# Altium PCB etapa_3.PcbDoc
Units mm, origin at the board's own origin, x right, y up, seen from the top; angles counter-clockwise.
Board outline 39 x 30.7 mm, 4 copper layers (Top Layer, X, Y, Bottom Layer); 124 components, 79 nets, 312 pads, 0 vias.
Unrouted connection lines stored in the file: 245.
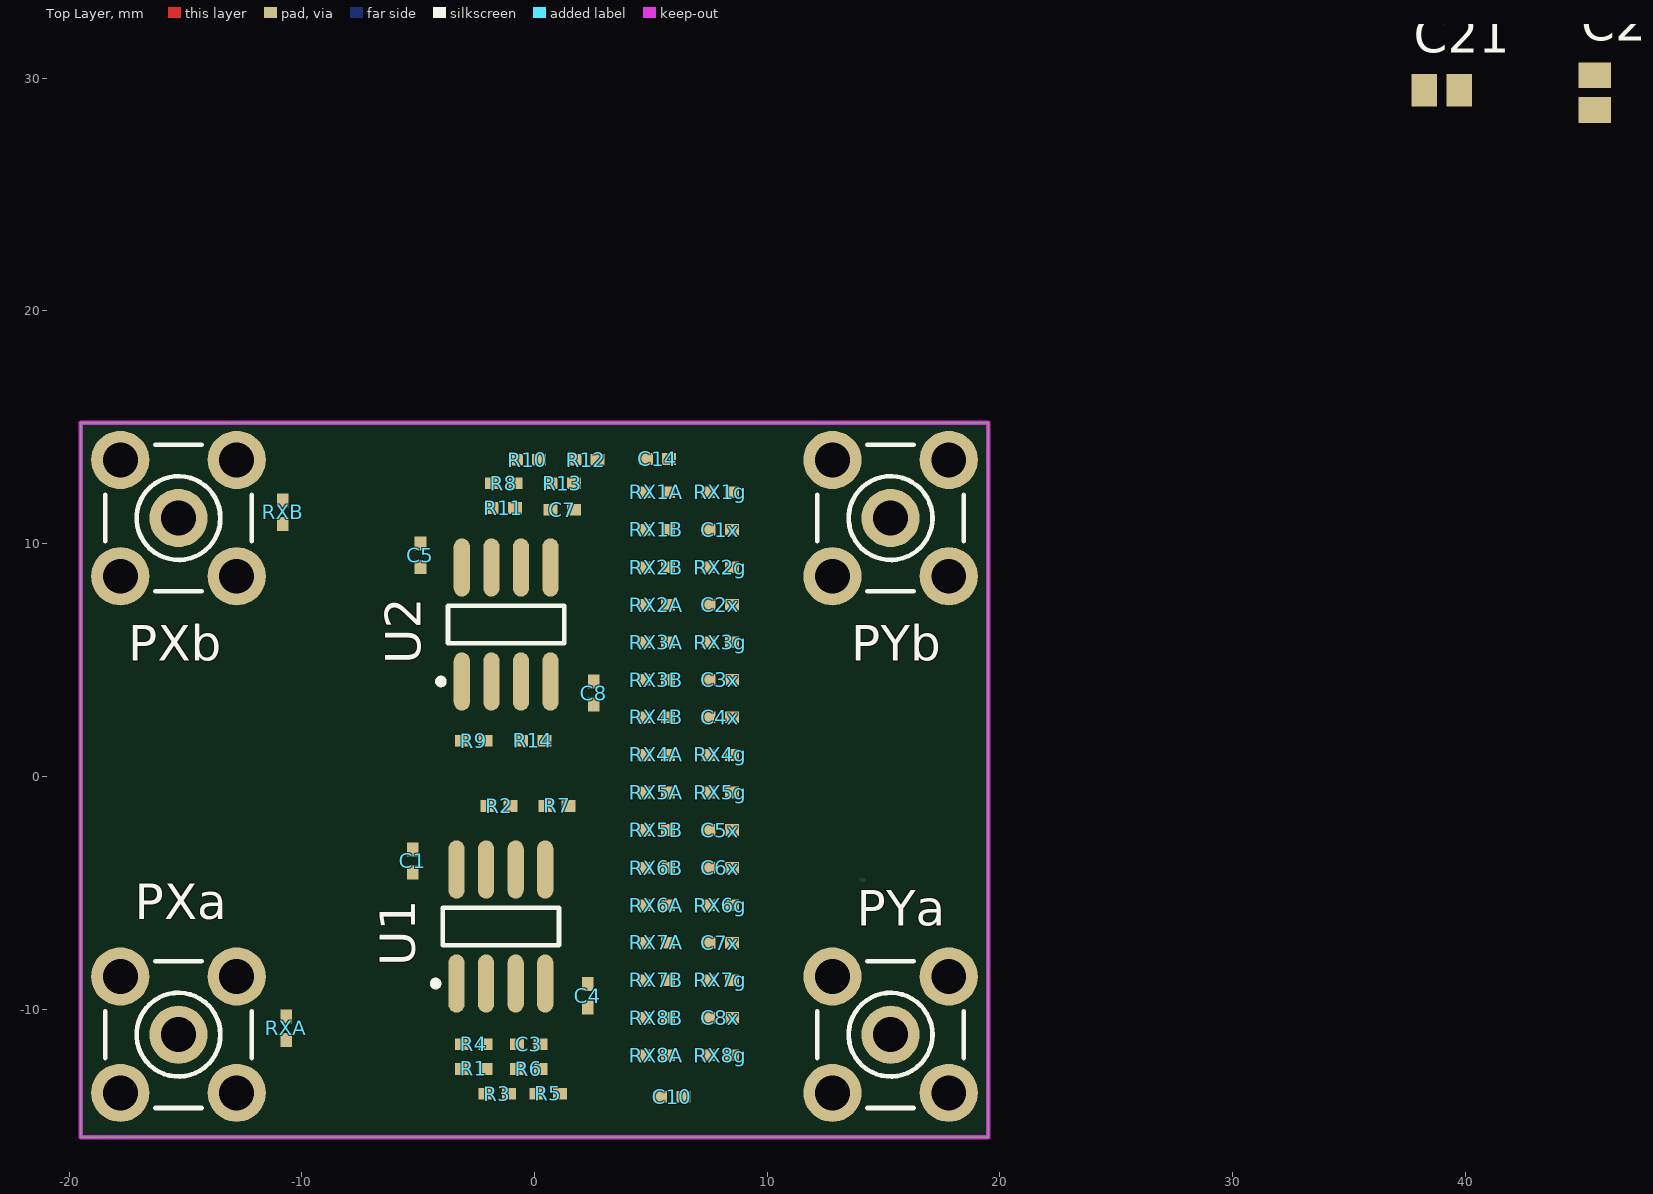
[diagram p0: Top Layer view]
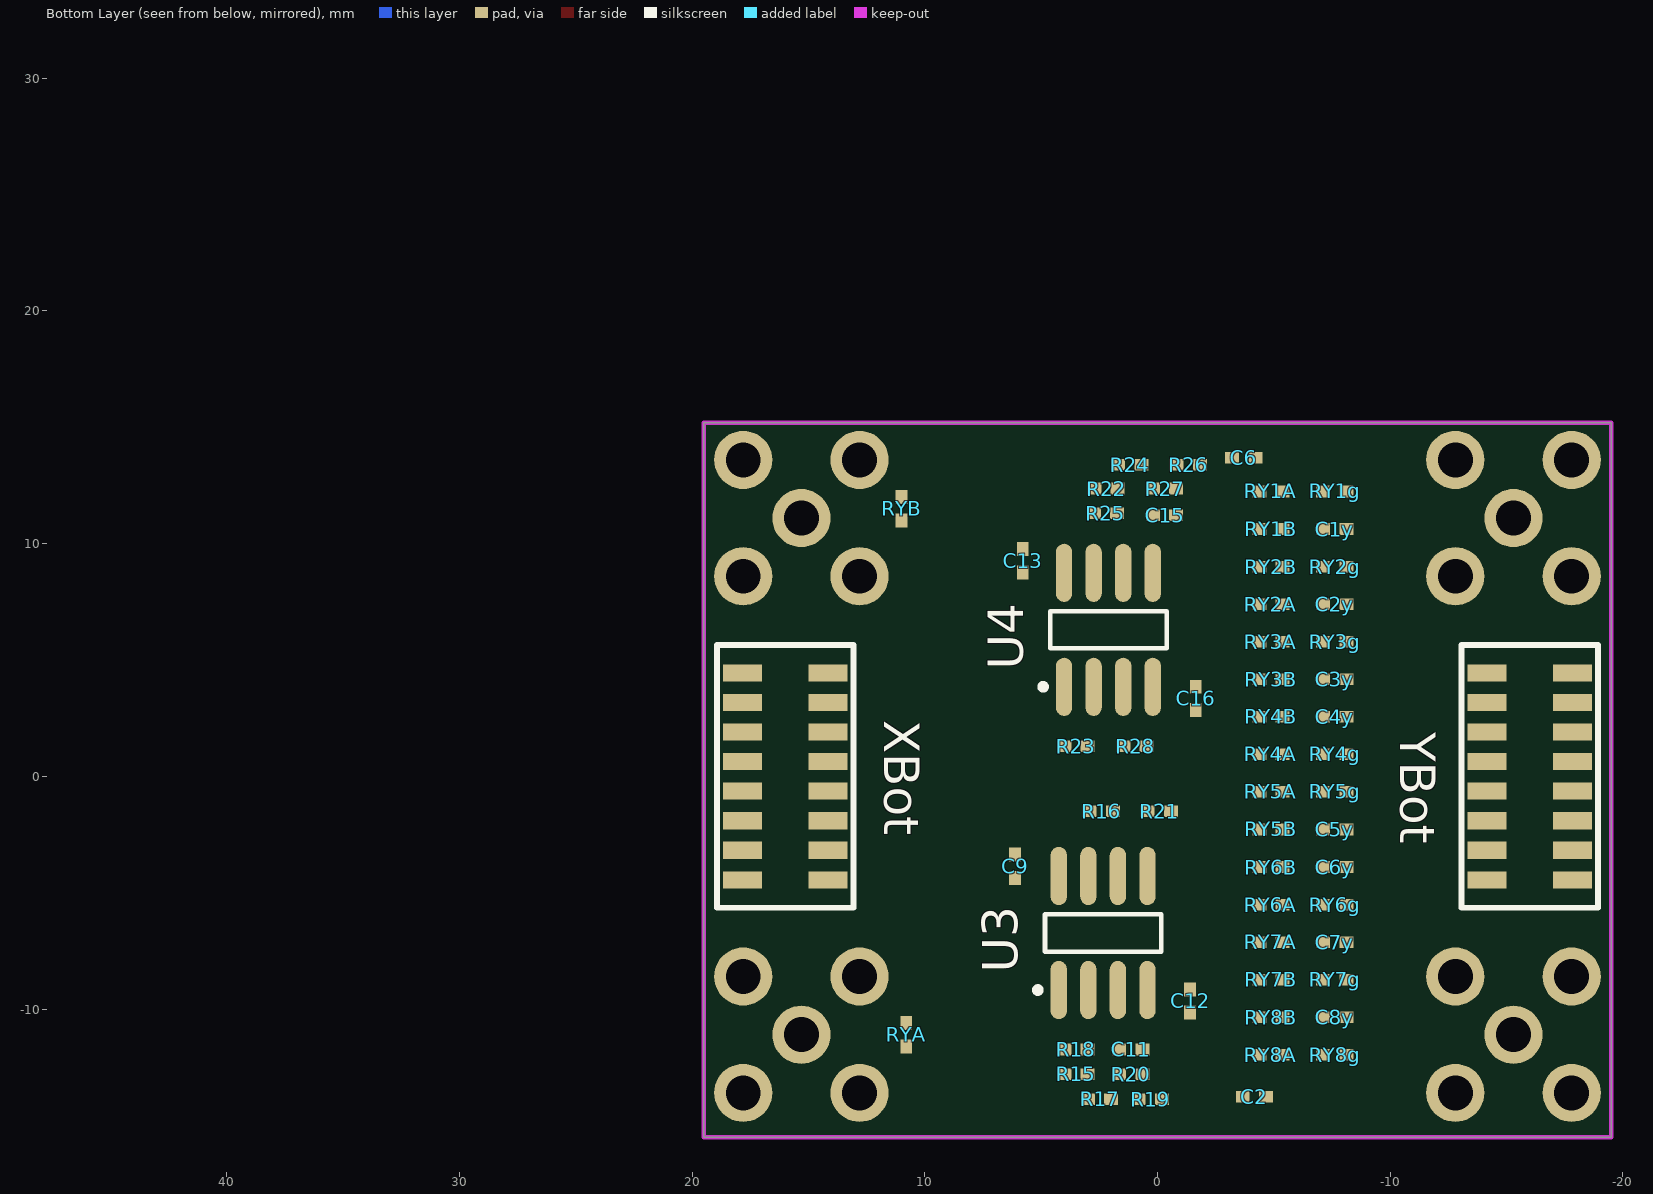
[diagram p1: Bottom Layer view, seen from below]

## Layer stack, top to bottom
Top Layer: signal copper 0.0356
Dielectric: prepreg 0.32, FR-4, Dk 4.8
X: signal copper 0.0356
Dielectric: core 0.32, FR-4, Dk 4.8
Y: signal copper 0.0356
Dielectric: prepreg 0.32, FR-4, Dk 4.8
Bottom Layer: signal copper 0.0356

## Board outline
-19.5,-15.5 -19.5,15.2 19.5,15.2 19.5,-15.5

## Design rules (kind name [scope] priority, off if disabled: settings)
Clearance Clearance_2 [InComponent('SiPM1')] p1: gap=0.15
Clearance Clearance_1 [IsTrack vs IsVia OR IsPad] p2: gap=0.203
Clearance [All] p3: gap=0.152
MinimumSolderMaskSliver MinimumSolderMaskSliver_1 [InComponent('SiPM1')] p1: minsoldermaskwidth=0.05
MinimumSolderMaskSliver [All] p2: minsoldermaskwidth=0.05
PasteMaskExpansion [InComponent('SiPM1')] p1: expansion=0
PlaneConnect PlaneConnect_1 [IsVia AND InNet('GND')] p1: planeconnectstyle=Direct reliefexpansion=0.508 reliefentries=4 reliefconductorwidth=0.254 reliefairgap=0.254
PlaneConnect [All] p2: planeconnectstyle=Relief reliefexpansion=0.508 reliefentries=4 reliefconductorwidth=0.254 reliefairgap=0.254
PolygonConnect [All] p1: connectstyle=Relief reliefconductorwidth=0.254 reliefentries=4 polygonreliefangle="90 Angle"
RoutingTopology [All] p1: topology=Daisy_Balanced
RoutingVias [All] p1: holewidth=0.3 width=0.6 viastyle="Through Hole" minholewidth=0.203 minwidth=0.406 maxholewidth=0.3 maxwidth=0.6
SilkToSilkClearance [All] p1: silktosilkclearance=0.127
SilkscreenOverComponentPads [All] p1: minsilkscreentomaskgap=0.127
SolderMaskExpansion SolderMaskExpansion_2 [(InComponent('SiPM1') OR InComponent('SiPM2') OR InComponent('SiPM3') OR InComponent('SiPM4'))] p1: expansion=0.05
SolderMaskExpansion SolderMaskExpansion_1 [IsVia] p2: expansion=0.051
SolderMaskExpansion [All] p3: expansion=0.051
Width Width_1 [(InNet('GND') AND OnLayer('Bottom Layer'))] p1: maxlimit=0.381 minlimit=0.254 preferedwidth=0.305
Width [All] p2: maxlimit=0.152 minlimit=0.152 preferedwidth=0.152 minimp=50.000000 maximp=50.000000 favimp=50.000000
22 further rules are at their usual default settings.

## Classes and differential pairs
component class etapa3_anger_Y: C1y C2y C3y C4y C5y C6y C7y C8y C9 C10 C11 C12 C13 C14 C15 C16 PYa PYb R15 R16 R17 R18 R19 R20 R21 R22 R23 R24 R25 R26 R27 R28 RY1A RY1B RY1g RY2A RY2B RY2g RY3A RY3B RY3g RY4A RY4B RY4g RY5A RY5B RY5g RY6A RY6B RY6g RY7A RY7B RY7g RY8A RY8B RY8g RYA RYB U3 U4 YBot
component class etapa3_anger_X: C1 C1x C2 C2x C3 C3x C4 C4x C5 C5x C6 C6x C7 C7x C8 C8x C21 C22 PXa PXb R1 R2 R3 R4 R5 R6 R7 R8 R9 R10 R11 R12 R13 R14 RX1A RX1B RX1g RX2A RX2B RX2g RX3A RX3B RX3g RX4A RX4B RX4g RX5A RX5B RX5g RX6A RX6B RX6g RX7A RX7B RX7g RX8A RX8B RX8g RXA RXB U1 U2 XBot

## Components (designator, comment, footprint, x,y, rotation, side; value= is the part's Value field where it differs from the comment)
C1 "Cap" 0402 -5.232,-3.632 r90 top
C1x "Cap" 0402 7.976,10.604 r180 top
C1y "Cap" 0402 -7.62,10.629 r0 bottom
C2 "Cap" 0402 -4.166,-13.767 r180 bottom
C2x "Cap" 0402 7.976,7.376 r180 top
C2y "Cap" 0402 -7.62,7.402 r0 bottom
C3 "Cap" 0402 -0.254,-11.506 r0 top
C3x "Cap" 0402 7.976,4.149 r180 top
C3y "Cap" 0402 -7.62,4.174 r0 bottom
C4 "Cap" 0402 2.286,-9.423 r90 top
C4x "Cap" 0402 7.976,2.535 r180 top
C4y "Cap" 0402 -7.62,2.56 r0 bottom
C5 "Cap" 0402 -4.902,9.5 r90 top
C5x "Cap" 0402 7.976,-2.306 r180 top
C5y "Cap" 0402 -7.62,-2.281 r0 bottom
C6 "Cap" 0402 -3.708,13.691 r180 bottom
C6x "Cap" 0402 7.976,-3.92 r180 top
C6y "Cap" 0402 -7.62,-3.895 r0 bottom
C7 "Cap" 0402 1.194,11.455 r0 top
C7x "Cap" 0402 7.976,-7.148 r180 top
C7y "Cap" 0402 -7.62,-7.122 r0 bottom
C8 "Cap" 0402 2.54,3.581 r90 top
C8x "Cap" 0402 7.976,-10.375 r180 top
C8y "Cap" 0402 -7.62,-10.35 r0 bottom
C9 "Cap" 0402 6.119,-3.861 r90 bottom
C10 "Cap" 0402 5.893,-13.767 r0 top
C11 "Cap" 0402 1.141,-11.735 r180 bottom
C12 "Cap" 0402 -1.399,-9.652 r90 bottom
C13 "Cap" 0402 5.789,9.271 r90 bottom
C14 "Cap" 0402 5.283,13.64 r0 top
C15 "Cap" 0402 -0.307,11.227 r180 bottom
C16 "Cap" 0402 -1.653,3.353 r90 bottom
C21 "Cap Pol3" C0805 38.989,29.489 r0 top
C22 "Cap Pol3" C0805 45.568,29.388 r90 top
PXa "SMA" SMB_V-RJ45 -15.3,-11.1 r0 top
PXb "SMA" SMB_V-RJ45 -15.3,11.1 r0 top
PYa "SMA" SMB_V-RJ45 15.3,-11.1 r0 top
PYb "SMA" SMB_V-RJ45 15.3,11.1 r0 top
R1 "Res3" 0402 -2.616,-12.573 r180 top
R2 "Res3" 0402 -1.524,-1.27 r0 top
R3 "Res3" 0402 -1.6,-13.64 r0 top
R4 "Res3" 0402 -2.616,-11.506 r0 top
R5 "Res3" 0402 0.584,-13.64 r180 top
R6 "Res3" 0402 -0.254,-12.573 r0 top
R7 "Res3" 0402 0.965,-1.27 r0 top
R8 "Res3" 0402 -1.321,12.598 r180 top
R9 "Res3" 0402 -2.616,1.524 r0 top
R10 "Res3" 0402 -0.305,13.614 r0 top
R11 "Res3" 0402 -1.346,11.532 r0 top
R12 "Res3" 0402 2.21,13.614 r180 top
R13 "Res3" 0402 1.194,12.598 r0 top
R14 "Res3" 0402 -0.076,1.524 r0 top
R15 "Res3" 0402 3.503,-12.802 r180 bottom
R16 "Res3" 0402 2.411,-1.499 r180 bottom
R17 "Res3" 0402 2.487,-13.868 r180 bottom
R18 "Res3" 0402 3.503,-11.735 r180 bottom
R19 "Res3" 0402 0.303,-13.868 r180 bottom
R20 "Res3" 0402 1.141,-12.802 r180 bottom
R21 "Res3" 0402 -0.078,-1.499 r180 bottom
R22 "Res3" 0402 2.208,12.37 r180 bottom
R23 "Res3" 0402 3.503,1.295 r180 bottom
R24 "Res3" 0402 1.192,13.386 r180 bottom
R25 "Res3" 0402 2.233,11.303 r180 bottom
R26 "Res3" 0402 -1.323,13.386 r180 bottom
R27 "Res3" 0402 -0.307,12.37 r180 bottom
R28 "Res3" 0402 0.963,1.295 r180 bottom
RX1A "Res3" 0402 5.232,12.217 r0 top
RX1B "Res3" 0402 5.232,10.604 r0 top
RX1g "Res3" 0402 7.976,12.217 r180 top
RX2A "Res3" 0402 5.232,7.376 r0 top
RX2B "Res3" 0402 5.232,8.99 r0 top
RX2g "Res3" 0402 7.976,8.99 r180 top
RX3A "Res3" 0402 5.232,5.762 r0 top
RX3B "Res3" 0402 5.232,4.149 r0 top
RX3g "Res3" 0402 7.976,5.762 r180 top
RX4A "Res3" 0402 5.232,0.921 r0 top
RX4B "Res3" 0402 5.232,2.535 r0 top
RX4g "Res3" 0402 7.976,0.921 r180 top
RX5A "Res3" 0402 5.232,-0.693 r0 top
RX5B "Res3" 0402 5.232,-2.306 r0 top
RX5g "Res3" 0402 7.976,-0.693 r180 top
RX6A "Res3" 0402 5.232,-5.534 r0 top
RX6B "Res3" 0402 5.232,-3.92 r0 top
RX6g "Res3" 0402 7.976,-5.534 r180 top
RX7A "Res3" 0402 5.232,-7.148 r0 top
RX7B "Res3" 0402 5.232,-8.761 r0 top
RX7g "Res3" 0402 7.976,-8.761 r180 top
RX8A "Res3" 0402 5.232,-11.989 r0 top
RX8B "Res3" 0402 5.232,-10.375 r0 top
RX8g "Res3" 0402 7.976,-11.989 r180 top
RXA "Res3" 0402 -10.668,-10.82 r90 top
RXB "Res3" 0402 -10.82,11.354 r90 top
RY1A "Res3" 0402 -4.877,12.243 r180 bottom
RY1B "Res3" 0402 -4.877,10.629 r180 bottom
RY1g "Res3" 0402 -7.62,12.243 r0 bottom
RY2A "Res3" 0402 -4.877,7.402 r180 bottom
RY2B "Res3" 0402 -4.877,9.015 r180 bottom
RY2g "Res3" 0402 -7.62,9.015 r0 bottom
RY3A "Res3" 0402 -4.877,5.788 r180 bottom
RY3B "Res3" 0402 -4.877,4.174 r180 bottom
RY3g "Res3" 0402 -7.62,5.788 r0 bottom
RY4A "Res3" 0402 -4.877,0.947 r180 bottom
RY4B "Res3" 0402 -4.877,2.56 r180 bottom
RY4g "Res3" 0402 -7.62,0.947 r0 bottom
RY5A "Res3" 0402 -4.877,-0.667 r180 bottom
RY5B "Res3" 0402 -4.877,-2.281 r180 bottom
RY5g "Res3" 0402 -7.62,-0.667 r0 bottom
RY6A "Res3" 0402 -4.877,-5.508 r180 bottom
RY6B "Res3" 0402 -4.877,-3.895 r180 bottom
RY6g "Res3" 0402 -7.62,-5.508 r0 bottom
RY7A "Res3" 0402 -4.877,-7.122 r180 bottom
RY7B "Res3" 0402 -4.877,-8.736 r180 bottom
RY7g "Res3" 0402 -7.62,-8.736 r0 bottom
RY8A "Res3" 0402 -4.877,-11.963 r180 bottom
RY8B "Res3" 0402 -4.877,-10.35 r180 bottom
RY8g "Res3" 0402 -7.62,-11.963 r0 bottom
RYA "Res3" 0402 10.795,-11.1 r270 bottom
RYB "Res3" 0402 10.998,11.506 r270 bottom
U1 "THS4062" SO-8_M -1.448,-6.452 r90 top
U2 "THS4062" SO-8_M -1.219,6.528 r90 top
U3 "THS4062" SO-8_M 2.335,-6.731 r90 bottom
U4 "THS4062" SO-8_M 2.106,6.299 r90 bottom
XBot "FLE-108-01-XX-DV" FLE-108-01-XX-DV 16,0 r90 bottom
YBot "FLE-108-01-XX-DV" FLE-108-01-XX-DV -16,0 r270 bottom

## Footprints (in the part's own frame and the unit in brackets; to place one, negate y for a bottom-side part, rotate by r counter-clockwise, add the part's x,y. Pads: shape width x height; smd on the part's side, far side on the other; paste and mask are expansions set on the pad)
0402 [mm] "Chip Capacitor, Body 1.0x0.5mm, IPC High Density"
  rect 0.6x0.5 smd: 1(-0.5,0) 2(0.5,0)
  body extent -0.55,-0.3 0.55,0.3, height 1.3
C0805 [mm] "Chip Capacitor, Body 2.0x1.3mm, IPC High Density"
  rect 1.1x1.4 smd: 1(-0.75,0) 2(0.75,0)
  body extent -1.1,-0.72 1.1,0.72, height 1.4
FLE-108-01-XX-DV [mil]
  rect 29x66 smd mask+2: 1(-175,72.5) 2(-175,-72.5) 3(-125,72.5) 4(-125,-72.5) 5(-75,72.5) 6(-75,-72.5) 7(-25,72.5) 8(-25,-72.5) 9(25,72.5) 10(25,-72.5) 11(75,72.5) 12(75,-72.5) 13(125,72.5) 14(125,-72.5) 15(175,72.5) 16(175,-72.5)
  silkscreen extent -222,-116 222,116
SMB_V-RJ45 [mm] "Connector; SMB Straight"
  round 2.5 hole 1.5: 1(0,0) 2(-2.5,-2.5) 2(-2.5,2.5) 2(2.5,-2.5) 2(2.5,2.5)
  silkscreen extent -3.15,-3.15 3.15,3.15
SO-8_M [mm] "SOIC, 8-Leads, Body 4.9x3.9mm, Pitch 1.27mm, IPC Low Density"
  oval 2.5x0.7 smd: 1(-2.45,1.905) 2(-2.45,0.635) 3(-2.45,-0.635) 4(-2.45,-1.905) 5(2.45,-1.905) 6(2.45,-0.635) 7(2.45,0.635) 8(2.45,1.905)
  silkscreen extent -2.57,-2.5 0.8,2.93, body extent -2,-2.5 2,2.5, height 1.75

## Part data
C1 C1x C1y C2 C2x C2y C3 C3x C3y C4 C4x C4y C5 C5x C5y C6 C6x C6y C7 C7x C7y C8 C8x C8y C9 C10 C11 C12 C13 C14 C15 C16: "Capacitor"
C21 C22: "Polarized Capacitor (Surface Mount)"
PXa PXb PYa PYb: library part SMB, "SMB Straight Connector"
R1 R2 R3 R4 R5 R6 R7 R8 R9 R10 R11 R12 R13 R14 R15 R16 R17 R18 R19 R20 R21 R22 R23 R24 R25 R26 R27 R28 RX1A RX1B RX1g RX2A RX2B RX2g RX3A RX3B RX3g RX4A RX4B RX4g RX5A RX5B RX5g RX6A RX6B RX6g RX7A RX7B RX7g RX8A RX8B RX8g RXA RXB RY1A RY1B RY1g RY2A RY2B RY2g RY3A RY3B RY3g RY4A RY4B RY4g RY5A RY5B RY5g RY6A RY6B RY6g RY7A RY7B RY7g RY8A RY8B RY8g RYA RYB: "Resistor"
U1 U2 U3 U4: library part AD8002AR, "Dual 600MHz, 50mW Current Feedback Amplifier"
XBot YBot: "DUAL ROW 0.050'' STRIP ASSEMBLY."

## Nets (pads, with @x,y where several pads share a name; then routed paths per layer and width w, separated by ;. In a path a pad name is that pad's centre, name@x,y a point inside that pad or via, vN(x,y) a via of type N, cw(c..) or ccw(c..) an arc to the next point about the centre after c; other vN are vias at no path point)
+5: C1.1 C5.1 C9.1 C13.1 C21.1 U1.8 U2.8 U3.8 U4.8 XBot.5 YBot.11
-5: C4.2 C8.2 C12.2 C16.2 C22.2 U1.4 U2.4 U3.4 U4.4 XBot.9 YBot.7
GND: C1.2 C3.2 C4.1 C5.2 C7.2 C8.1 C9.2 C11.2 C12.1 C13.2 C15.2 C16.1 C21.2 C22.1 PXa.2 PXb.2 PYa.2 PYb.2 R1.2 R7.2 R8.2 R14.2 R15.2 R21.2 R22.2 R28.2 RX1g.1 RX2g.1 RX3g.1 RX4g.1 RX5g.1 RX6g.1 RX7g.1 RX8g.1 RY1g.1 RY2g.1 RY3g.1 RY4g.1 RY5g.1 RY6g.1 RY7g.1 RY8g.1 XBot.1 XBot.3 XBot.7 XBot.11 XBot.13 XBot.15 YBot.1 YBot.3 YBot.5 YBot.9 YBot.13 YBot.15
NetC1x_1: C1x.1 XBot.16
NetC1x_2: C1x.2 RX1A.2 RX1B.2 RX1g.2
NetC1y_1: C1y.1 YBot.2
NetC1y_2: C1y.2 RY1A.2 RY1B.2 RY1g.2
NetC2_1: C2.1 R5.1 R6.2
NetC2_2: C2.2 R4.1 RXA.2 U1.1
NetC2x_1: C2x.1 XBot.14
NetC2x_2: C2x.2 RX2A.2 RX2B.2 RX2g.2
NetC2y_1: C2y.1 YBot.4
NetC2y_2: C2y.2 RY2A.2 RY2B.2 RY2g.2
NetC3_1: C3.1 R6.1 U1.3
NetC3x_1: C3x.1 XBot.12
NetC3x_2: C3x.2 RX3A.2 RX3B.2 RX3g.2
NetC3y_1: C3y.1 YBot.6
NetC3y_2: C3y.2 RY3A.2 RY3B.2 RY3g.2
NetC4x_1: C4x.1 XBot.10
NetC4x_2: C4x.2 RX4A.2 RX4B.2 RX4g.2
NetC4y_1: C4y.1 YBot.8
NetC4y_2: C4y.2 RY4A.2 RY4B.2 RY4g.2
NetC5x_1: C5x.1 XBot.8
NetC5x_2: C5x.2 RX5A.2 RX5B.2 RX5g.2
NetC5y_1: C5y.1 YBot.10
NetC5y_2: C5y.2 RY5A.2 RY5B.2 RY5g.2
NetC6_1: C6.1 R12.1 R13.2
NetC6_2: C6.2 R11.1 RXB.2 U2.7
NetC6x_1: C6x.1 XBot.6
NetC6x_2: C6x.2 RX6A.2 RX6B.2 RX6g.2
NetC6y_1: C6y.1 YBot.12
NetC6y_2: C6y.2 RY6A.2 RY6B.2 RY6g.2
NetC7_1: C7.1 R13.1 U2.5
NetC7x_1: C7x.1 XBot.4
NetC7x_2: C7x.2 RX7A.2 RX7B.2 RX7g.2
NetC7y_1: C7y.1 YBot.14
NetC7y_2: C7y.2 RY7A.2 RY7B.2 RY7g.2
NetC8x_1: C8x.1 XBot.2 | length 0.1
  Bottom Layer w0.152: XBot.2@14.037,-4.445 XBot.2
NetC8x_2: C8x.2 RX8A.2 RX8B.2 RX8g.2
NetC8y_1: C8y.1 YBot.16
NetC8y_2: C8y.2 RY8A.2 RY8B.2 RY8g.2
NetC10_1: C10.1 R19.1 R20.2
NetC10_2: C10.2 R18.1 RYA.2 U3.1
NetC11_1: C11.1 R20.1 U3.3
NetC14_1: C14.1 R26.1 R27.2
NetC14_2: C14.2 R25.1 RYB.2 U4.7
NetC15_1: C15.1 R27.1 U4.5
NetC24_1: 
NetC24_2: 
NetC25_1: 
NetPTrig_1: 
NetPXa_1: PXa.1 RXA.1
NetPXb_1: PXb.1 RXB.1
NetPYa_1: PYa.1 RYA.1
NetPYb_1: PYb.1 RYB.1
NetR1_1: R1.1 R3.1 R4.2 U1.2
NetR2_1: R2.1 R3.2 R5.2 U1.7
NetR2_2: R2.2 RX1A.1 RX2A.1 RX3A.1 RX4A.1 RX5A.1 RX6A.1 RX7A.1 RX8A.1 U1.6
NetR7_1: R7.1 U1.5
NetR8_1: R8.1 R10.1 R11.2 U2.6
NetR9_1: R9.1 R10.2 R12.2 U2.1
NetR9_2: R9.2 RX1B.1 RX2B.1 RX3B.1 RX4B.1 RX5B.1 RX6B.1 RX7B.1 RX8B.1 U2.2
NetR14_1: R14.1 U2.3
NetR15_1: R15.1 R17.1 R18.2 U3.2
NetR16_1: R16.1 R17.2 R19.2 U3.7
NetR16_2: R16.2 RY1A.1 RY2A.1 RY3A.1 RY4A.1 RY5A.1 RY6A.1 RY7A.1 RY8A.1 U3.6
NetR21_1: R21.1 U3.5
NetR22_1: R22.1 R24.1 R25.2 U4.6
NetR23_1: R23.1 R24.2 R26.2 U4.1
NetR23_2: R23.2 RY1B.1 RY2B.1 RY3B.1 RY4B.1 RY5B.1 RY6B.1 RY7B.1 RY8B.1 U4.2
NetR28_1: R28.1 U4.3
NetR29_1: 
NetR30_1: 
NetR30_2: 
NetR33_2: 
NetR35_2: 
NetR38_2: 
NetR39_1: 
NetR40_2: 

## Keep-outs
Keep-Out Layer:
  the board outline again, w0.2

## Text inside footprints (layer, text, board x,y; h text height)
XBot: Mechanical 1 "J1" at 15.492,-0.497 h0.76 r270
YBot: Mechanical 1 "J1" at -15.492,0.497 h0.76 r90